# EAGLE board Final_v2 (EAGLE 8.6.3)
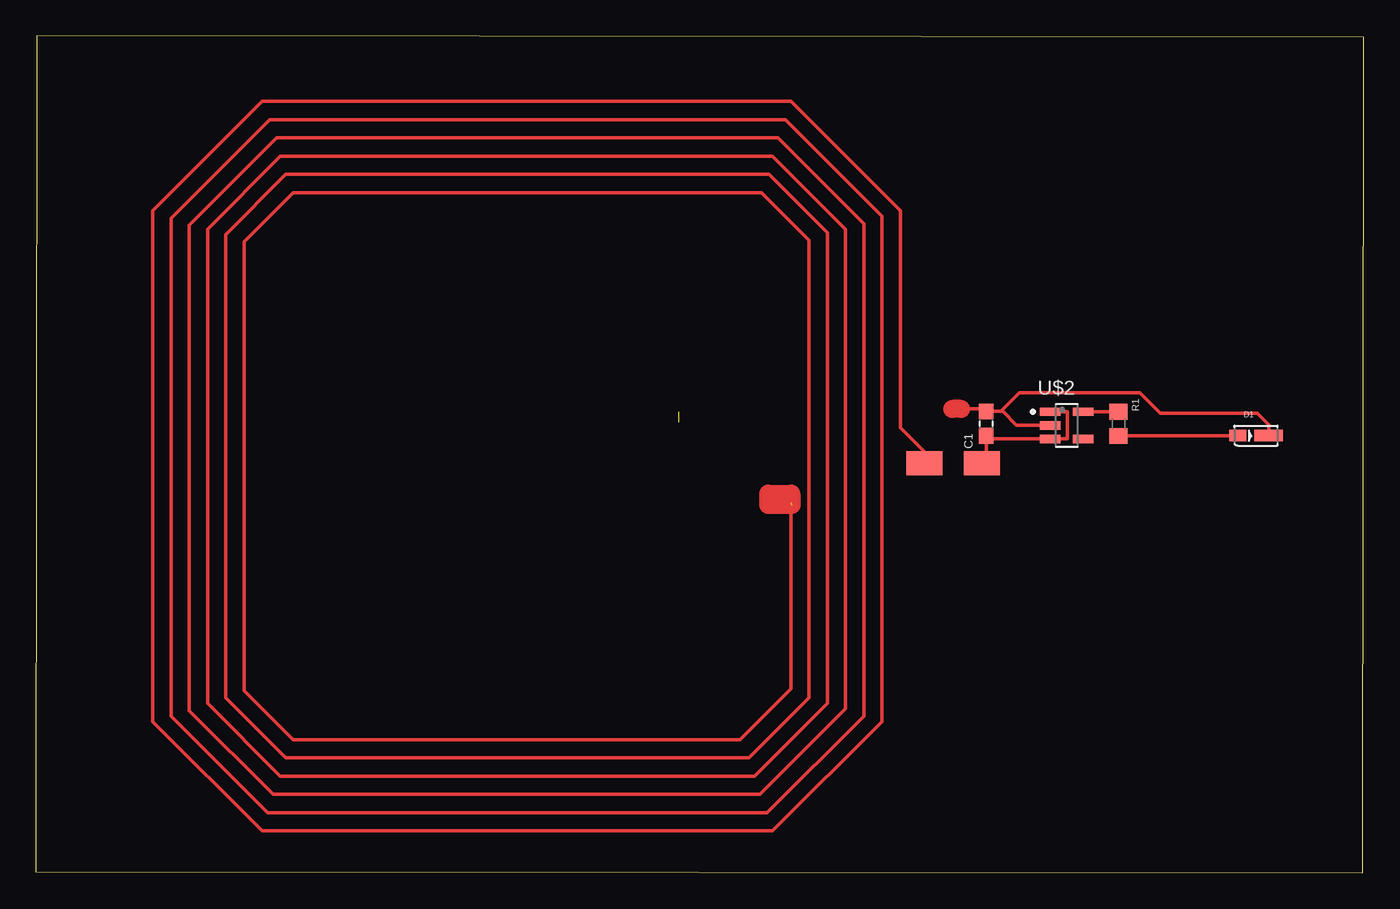
[diagram p0: board, top side]

Size 92.48 x 58.27 mm. Coordinates in mm from the lower left corner, seen from the top.
Outline: 0,0.08 92.43,0 92.48,58.2 0.05,58.27 0,0.08
Copper layers (1*16): Top 0.035mm / dielectric 1.5mm / Bottom 0.035mm
Design rules "default": minimum track width 6mil, minimum drill 0.35mm, track to track 6mil, track to pad 6mil, pad to pad 6mil, via to via 6mil, smd to smd 6mil, copper to edge 40mil, drill to drill 6mil, minimum pad ring 10mil, minimum via ring 8mil, stop-mask expansion 4mil, vias tented up to drill 0mil, thermal gap 10mil

## Footprints (pad centres in the part's own frame; a part is rotated, then mirrored left to right if it is on the bottom)
CAPC1608X90 = smd 1.1 x 1: 1 -0.85,0; 2 0.85,0
WL-SWTP_3014 = smd 2 x 0.8: 1 0.88,0 | smd 1.2 x 0.8: 2 -1.27,0
RESC1608X55 = smd 1.1 x 1.25: 1 -0.85,0; 2 0.85,0
SMA-DIODE = smd 2.5 x 1.7: 1 -1.992,0.015; 2 2.008,0.015
SOP95P275X110-5N = smd 1.42 x 0.58: 1 -1.145,0.95; 2 -1.145,0; 3 -1.145,-0.95; 4 1.145,-0.95; 5 1.145,0.95

## Placement (x,y rotation side)
C1  06036D225KAT2A  [CAPC1608X90]  66.19,31.28 90 top
D1  WL-SWTP3014  [WL-SWTP_3014]  84.98,30.45 0 top
R1  CRCW06033K30FKEA  [RESC1608X55]  75.41,31.26 270 top
U$1  B220A-13-F  [SMA-DIODE]  63.88,28.5 0 top
U$2  NCV8161  [SOP95P275X110-5N]  71.8,31.16 0 top

## Library data of the parts
C1 = Capacitor_2.2uF_0603; DESCRIPTION: 0603 2.2 uF 6.3 V ±10 % Tolerance X5R Surface Mount Multilayer Ceramic Capacitor; DIGI-KEY_PART_NUMBER: 478-1252-1-ND; DIGI-KEY_PURCHASE_URL: https://www.digikey.co.uk/product-detail/en/avx-corporation/06036D225KAT2A/478-1252-1-ND/564284?utm_source=snapeda&utm_medium=aggregator&utm_campaign=symbol; MF: AVX; MP: 06036D225KAT2A; PACKAGE: 0603 AVX
D1 = WL-SWTP; DESCRIPTION: SMD LED PLCC2 Daylight white 120 ° 3.2 V Wuerth Elektronik; DIGI-KEY_PART_NUMBER: 732-5661-1-ND; DIGI-KEY_PURCHASE_URL: https://www.digikey.co.uk/product-detail/en/wurth-electronics-inc/158301250/732-5661-1-ND/4947879?utm_source=snapeda&utm_medium=aggregator&utm_campaign=symbol; MF: Wurth Electronics; MP: 158301250; PACKAGE: 1206 Würth Elektronik
R1 = CRCW06033K30FKEA; DESCRIPTION: Res Thick Film 0603 3.3K Ohm 1% 0.1W_1/10W_ ?100ppm/C SMD Automotive Paper T/R; DIGI-KEY_PART_NUMBER: 541-3.30KHCT-ND; DIGI-KEY_PURCHASE_URL: https://www.digikey.com/product-detail/en/vishay-dale/CRCW06033K30FKEA/541-3.30KHCT-ND/1179866?utm_source=snapeda&utm_medium=aggregator&utm_campaign=symbol; MF: Vishay Dale; MP: CRCW06033K30FKEA; PACKAGE: 0603 Vishay
U$1 = Schottky_0603; DESCRIPTION: B220A Series 20 V 2 A Surface Mount Schottky Barrier Rectifier - SMA; DIGI-KEY_PART_NUMBER: B220A-FDICT-ND; DIGI-KEY_PURCHASE_URL: https://www.digikey.co.uk/product-detail/en/diodes-incorporated/B220A-13-F/B220A-FDICT-ND/751528?utm_source=snapeda&utm_medium=aggregator&utm_campaign=symbol; MF: Diodes Inc.; MP: B220A-13-F; PACKAGE: DO-214 Diodes Inc.
U$2 = NCV8161_LDO

## Nets
GND: C1.2 D1.1 U$2.2
IN+: U$1.1
N$1: R1.1 U$2.5
N$2: D1.2 R1.2
N$4: C1.1 U$1.2 U$2.1 U$2.3

## Tracks (layer width: path | path; a pad name or v marks a point on that pad's centre or on a via)
GND
  Top 0.254: 67.23,32.12 C1.2 66.02,32.3 64.44,32.3 | 67.23,32.12 67.34,32.12 68.31,31.16 U$2.2 | D1.1 85.86,31.21 85.07,32 78.32,32 76.91,33.41 68.52,33.41 67.23,32.12
  Top 1.27: 64.44,32.3 63.86,32.3 63.84,32.28
GND4  (1 unrouted)
  Top 0.254: 56.4,28.32 56.4,44.82 51.32,49.9 17.03,49.9 11.95,44.82 11.95,11.8 17.03,6.73 50.05,6.73 55.13,11.8 55.13,44.57 51.07,48.63 17.41,48.63 13.22,44.44 13.22,12.19 17.41,8 49.67,8 53.86,12.19 53.86,44.06 50.56,47.36 17.92,47.36 14.49,43.94 14.49,12.69 17.92,9.27 49.04,9.27 52.59,12.82 52.59,25.78
  Top 1.27: 52.62,25.61 51.83,25.61 51.82,25.6 51.02,25.6 51.02,26.4 52.62,26.4 52.62,25.61 | 52.62,25.61 52.65,25.61
IN+
  Top 0.254: 56.4,28.32 56.4,11.42 50.43,5.46 16.52,5.46 10.68,11.3 10.68,45.08 16.78,51.17 51.7,51.17 57.67,45.21 57.67,10.92 50.94,4.19 16.14,4.19 9.41,10.92 9.41,45.59 16.27,52.45 52.21,52.45 58.94,45.71 58.94,10.54 51.32,2.92 15.76,2.92 8.14,10.54 8.14,46.09 15.76,53.71 52.59,53.71 60.21,46.09 60.21,31 61.88,29.33 U$1.1
N$1
  Top 0.254: U$2.5 R1.1
N$2
  Top 0.254: D1.2 75.44,30.45 R1.2
N$4
  Top 0.254: U$2.1 71.84,32.1 71.84,30.22 70.73,30.22 U$2.3 | U$2.3 | U$1.2 66.19,28.83 C1.1 66.4,30.22 U$2.3
N$7  (2 unrouted)